# Altium PCB SPE_To_Ethernet.PcbDoc (part 3 of 3)
Units mm, origin at the board's own origin, x right, y up, seen from the top; angles counter-clockwise.
Board outline 152.4 x 101.6 mm, 4 copper layers (Top Layer, GND, Power, Bottom Layer), stack 1.526 mm thick; 154 components, 131 nets, 628 pads, 232 vias.
Unrouted connection lines stored in the file: 149.
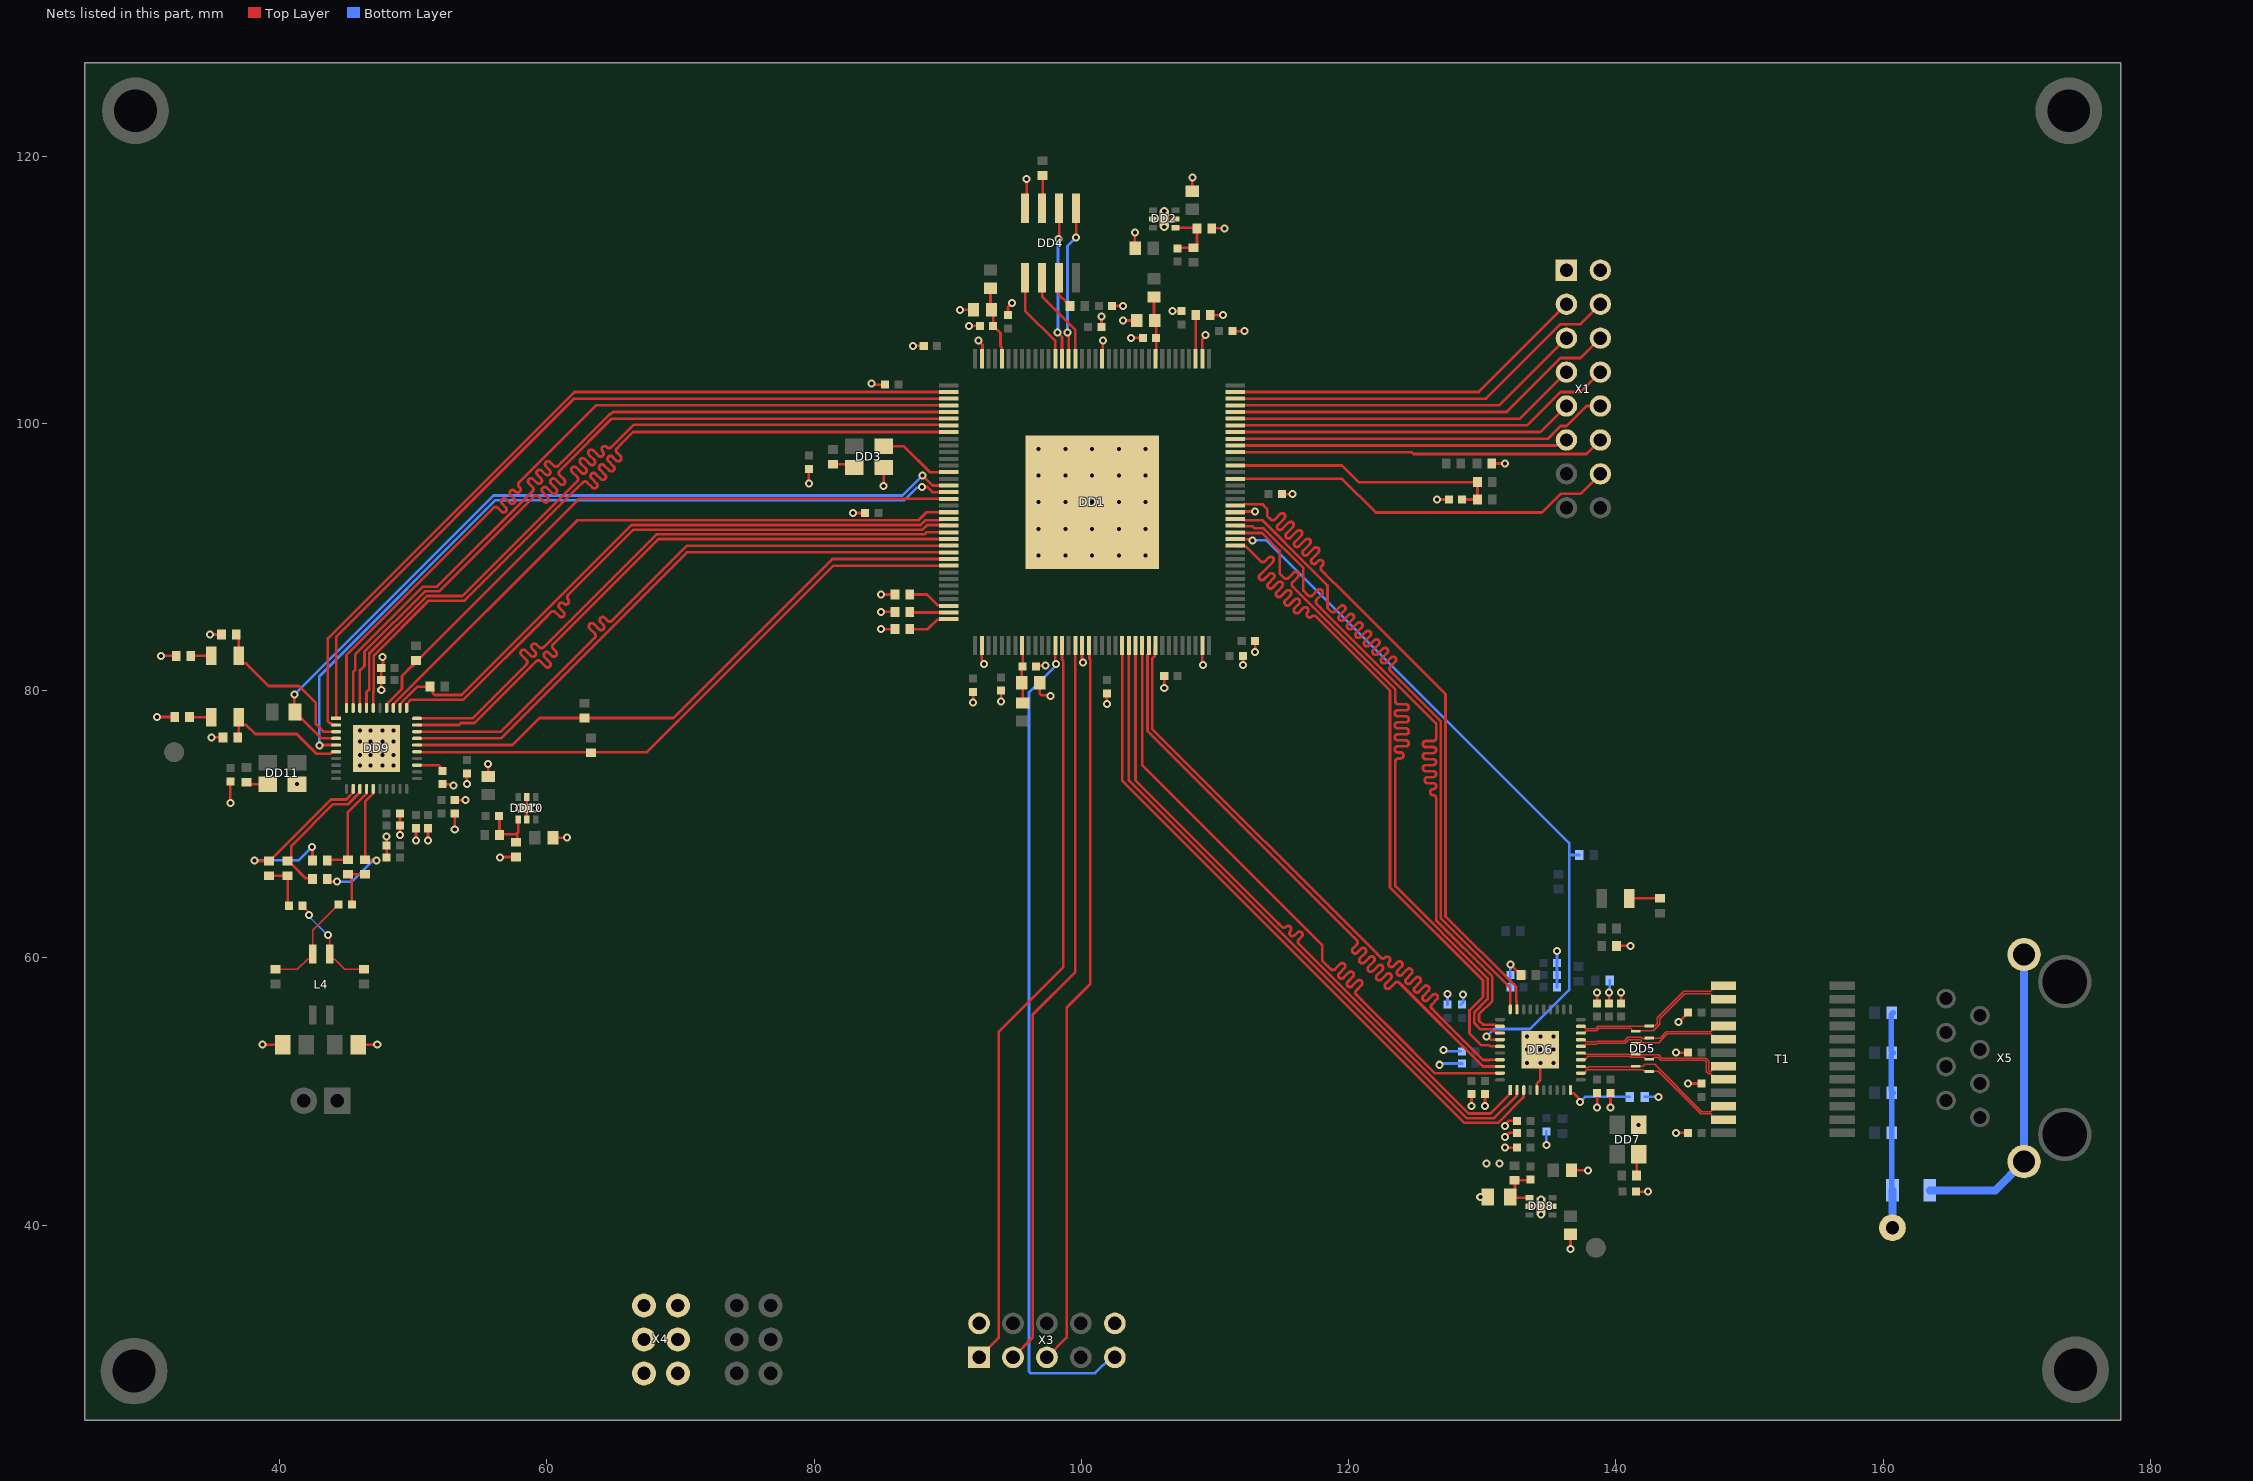
[diagram p4: the nets of this part, all layers, seen from the top]

## Via types
v1: diameter 0.6, hole 0.3, Top Layer to Bottom Layer, tented both sides, 207 vias
v2: diameter 0.7, hole 0.3, Top Layer to Bottom Layer, tented both sides, 25 vias

## Nets (pads, with @x,y where several pads share a name; then routed paths per layer and width w, separated by ;. In a path a pad name is that pad's centre, name@x,y a point inside that pad or via, vN(x,y) a via of type N, cw(c..) or ccw(c..) an arc to the next point about the centre after c; other vN are vias at no path point) (continued)
ETH_RX_CTL: DD1.48 DD6.35 | length 57.6
  Top Layer w0.2: DD1.48@111.525,90.85 111.575,90.8 112.304,90.8 112.5,90.604 112.5,90.6 113.35,89.75 113.421,89.679 ccw(c113.58,89.838) 113.739,89.679 114.009,89.949 cw(c114.168,89.79) 114.327,89.949 cw(c114.168,89.79) 114.327,89.631 113.35,88.654 ccw(c113.509,88.495) 113.35,88.336 ccw(c113.509,88.495) 113.668,88.336 114.063,88.731 cw(c114.222,88.572) 114.381,88.731 cw(c114.222,88.572) 114.381,88.412 113.986,88.018 ccw(c114.145,87.858) 113.986,87.699 ccw(c114.145,87.858) 114.305,87.699 114.693,88.088 cw(c114.853,87.929) 115.012,88.088 cw(c114.853,87.929) 115.012,87.77 114.623,87.381 ccw(c114.782,87.222) 114.623,87.063 ccw(c114.782,87.222) 114.941,87.063 115.33,87.452 cw(c115.489,87.293) 115.648,87.452 cw(c115.489,87.293) 115.648,87.134 115.259,86.745 ccw(c115.418,86.586) 115.259,86.427 ccw(c115.418,86.586) 115.577,86.427 115.966,86.815 cw(c116.125,86.656) 116.284,86.815 cw(c116.125,86.656) 116.284,86.497 115.958,86.171 ccw(c116.117,86.012) 115.958,85.853 ccw(c116.117,86.012) 116.277,85.853 116.603,86.179 cw(c116.762,86.02) 116.921,86.179 cw(c116.762,86.02) 116.921,85.861 ccw(c117.08,85.702) 116.921,85.543 ccw(c117.08,85.702) 117.239,85.543 cw(c117.398,85.384) 117.557,85.543 117.943,85.157 118.013,85.087 123.1,80 123.1,65.274 130.05,58.324 130.05,57.072 129.05,56.072 129.05,54.35 129.95,53.45 130.272,53.45 130.528,53.45 130.603,53.375 DD6.35@131.325,53.375
ETH_RXC: DD1.49 DD6.34 R14.1 | length 54.9
  Top Layer w0.2: DD1.49@111.525,91.35 111.539,91.336 112.605,91.336 112.692,91.25 v1(112.8,91.25) ; v1(130.3,54.1) 130.408,54.1 130.633,53.875 DD6.34@131.325,53.875
  Bottom Layer w0.2: v1(112.8,91.25) 113.85,91.25 136.5,68.6 136.5,67.7 ; v1(130.3,54.1) 130.875,54.675 133.575,54.675 136.5,57.6 136.5,67.7 ; R14.1@137.25,67.7 136.5,67.7
ETH_RXD_0: DD1.50 DD6.33 | length 57.6
  Top Layer w0.2: DD1.50@111.525,91.85 112.1,91.85 112.15,91.8 112.267,91.8 113.5,91.8 114.836,90.464 114.836,88.759 115.097,88.497 115.168,88.427 ccw(c115.327,88.586) 115.486,88.427 115.875,88.816 cw(c116.034,88.657) 116.194,88.816 cw(c116.034,88.657) 116.194,88.497 115.805,88.109 ccw(c115.964,87.949) 115.805,87.79 116.027,87.568 116.097,87.497 117,86.595 123.5,80.095 123.5,79.3 123.5,79.2 ccw(c123.725,79.2) 123.725,78.975 124.275,78.975 cw(c124.275,78.75) 124.5,78.75 cw(c124.275,78.75) 124.275,78.525 123.675,78.525 ccw(c123.675,78.3) 123.45,78.3 ccw(c123.675,78.3) 123.675,78.075 124.275,78.075 cw(c124.275,77.85) 124.5,77.85 cw(c124.275,77.85) 124.275,77.625 123.675,77.625 ccw(c123.675,77.4) 123.45,77.4 ccw(c123.675,77.4) 123.675,77.175 124.275,77.175 cw(c124.275,76.95) 124.5,76.95 cw(c124.275,76.95) 124.275,76.725 123.675,76.725 ccw(c123.675,76.5) 123.45,76.5 ccw(c123.675,76.5) 123.675,76.275 124.275,76.275 cw(c124.275,76.05) 124.5,76.05 cw(c124.275,76.05) 124.275,75.825 123.675,75.825 ccw(c123.675,75.6) 123.45,75.6 ccw(c123.675,75.6) 123.675,75.375 123.878,75.375 cw(c123.878,75.15) 124.103,75.15 cw(c123.878,75.15) 123.878,74.925 123.725,74.925 ccw(c123.725,74.7) 123.5,74.7 123.5,74.259 123.5,65.369 130.4,58.469 130.4,56.927 129.4,55.927 129.4,55.117 129.867,54.65 130.699,54.65 130.848,54.5 130.933,54.5 130.936,54.5 131.061,54.375 DD6.33@131.325,54.375
ETH_RXD_1: DD1.51 DD6.32 | length 56.6
  Top Layer w0.2: DD1.51@111.525,92.35 111.575,92.3 112.8,92.3 112.95,92.15 113.645,92.15 116.609,89.186 116.609,87.491 116.9,87.2 116.971,87.129 ccw(c117.13,87.288) 117.289,87.129 117.678,87.518 cw(c117.837,87.359) 117.996,87.518 cw(c117.837,87.359) 117.996,87.2 117.607,86.811 ccw(c117.766,86.652) 117.607,86.493 117.829,86.271 117.9,86.2 126.549,77.551 126.549,77 126.549,76.45 cw(c126.324,76.45) 126.324,76.225 125.774,76.225 ccw(c125.774,76) 125.549,76 ccw(c125.774,76) 125.774,75.775 126.324,75.775 cw(c126.324,75.55) 126.549,75.55 cw(c126.324,75.55) 126.324,75.325 125.774,75.325 ccw(c125.774,75.1) 125.549,75.1 ccw(c125.774,75.1) 125.774,74.875 126.324,74.875 cw(c126.324,74.65) 126.549,74.65 cw(c126.324,74.65) 126.324,74.425 125.774,74.425 ccw(c125.774,74.2) 125.549,74.2 ccw(c125.774,74.2) 125.774,73.975 126.324,73.975 cw(c126.324,73.75) 126.549,73.75 cw(c126.324,73.75) 126.324,73.525 125.913,73.525 ccw(c125.913,73.3) 125.688,73.3 ccw(c125.913,73.3) 125.913,73.075 126.324,73.075 cw(c126.324,72.85) 126.549,72.85 cw(c126.324,72.85) 126.324,72.625 ccw(c126.324,72.4) 126.099,72.4 ccw(c126.324,72.4) 126.324,72.175 cw(c126.324,71.95) 126.549,71.95 126.549,71.396 126.549,62.815 130.75,58.614 130.75,56.782 129.75,55.782 129.75,55.289 130.039,55 130.933,55 130.937,55 131.061,54.875 DD6.32@131.325,54.875
ETH_RXD_2: DD1.52 DD6.30 | length 57.6
  Top Layer w0.2: DD1.52@111.525,92.85 112.1,92.85 112.2,92.75 113.54,92.75 116.959,89.331 118.412,87.878 118.412,86.188 118.6,86 118.671,85.929 ccw(c118.83,86.088) 118.989,85.929 119.378,86.318 cw(c119.537,86.159) 119.696,86.318 cw(c119.537,86.159) 119.696,86 119.305,85.609 ccw(c119.464,85.449) 119.305,85.29 ccw(c119.464,85.449) 119.623,85.29 120.014,85.682 cw(c120.173,85.523) 120.332,85.682 cw(c120.173,85.523) 120.332,85.364 119.941,84.972 ccw(c120.1,84.813) 119.941,84.654 ccw(c120.1,84.813) 120.259,84.654 120.651,85.045 cw(c120.81,84.886) 120.969,85.045 cw(c120.81,84.886) 120.969,84.727 120.577,84.336 ccw(c120.736,84.177) 120.577,84.018 ccw(c120.736,84.177) 120.896,84.018 121.287,84.409 cw(c121.446,84.25) 121.605,84.409 cw(c121.446,84.25) 121.605,84.091 121.214,83.699 ccw(c121.373,83.54) 121.214,83.381 ccw(c121.373,83.54) 121.532,83.381 121.923,83.773 cw(c122.083,83.614) 122.242,83.773 cw(c122.083,83.614) 122.242,83.454 121.85,83.063 ccw(c122.009,82.904) 121.85,82.745 ccw(c122.009,82.904) 122.168,82.745 122.56,83.136 cw(c122.719,82.977) 122.878,83.136 cw(c122.719,82.977) 122.878,82.818 122.487,82.427 ccw(c122.646,82.267) 122.487,82.108 ccw(c122.646,82.267) 122.805,82.108 123.167,82.47 cw(c123.326,82.311) 123.485,82.47 cw(c123.326,82.311) 123.485,82.152 123.125,81.793 ccw(c123.285,81.634) 123.125,81.475 123.465,81.135 123.536,81.064 126.899,77.701 126.899,62.96 132.1,57.759 DD6.30@132.1,56.15
ETH_RXD_3: DD1.54 DD6.29 | length 58
  Top Layer w0.2: DD1.54@111.525,93.85 112.1,93.85 112.2,93.95 113.55,93.95 113.9,93.6 113.9,93.078 114.089,92.889 ; DD6.29@132.6,56.15 132.59,56.16 132.59,56.732 132.55,56.772 132.55,57.804 127.249,63.105 127.249,77.977 127.249,79.751 119.7,87.3 119.678,87.3 118.239,88.739 118.168,88.81 117.978,89 cw(c118.137,89.159) 117.978,89.318 118.046,89.386 ccw(c117.887,89.545) 118.046,89.704 ccw(c117.887,89.545) 117.728,89.704 117.563,89.54 cw(c117.404,89.699) 117.245,89.54 cw(c117.404,89.699) 117.245,89.858 117.73,90.343 ccw(c117.571,90.502) 117.73,90.662 ccw(c117.571,90.502) 117.412,90.662 116.927,90.176 cw(c116.768,90.335) 116.609,90.176 cw(c116.768,90.335) 116.609,90.494 117.094,90.98 ccw(c116.935,91.139) 117.094,91.298 ccw(c116.935,91.139) 116.776,91.298 116.291,90.813 cw(c116.131,90.972) 115.972,90.813 cw(c116.131,90.972) 115.972,91.131 116.458,91.616 ccw(c116.299,91.775) 116.458,91.934 ccw(c116.299,91.775) 116.14,91.934 115.654,91.449 cw(c115.495,91.608) 115.336,91.449 cw(c115.495,91.608) 115.336,91.767 115.821,92.252 ccw(c115.662,92.412) 115.821,92.571 ccw(c115.662,92.412) 115.503,92.571 115.018,92.085 cw(c114.859,92.244) 114.7,92.085 cw(c114.859,92.244) 114.7,92.404 115.185,92.889 ccw(c115.026,93.048) 115.185,93.207 ccw(c115.026,93.048) 114.867,93.207 114.478,92.818 cw(c114.319,92.977) 114.16,92.818 ; 114.089,92.889 114.16,92.818 ; 114.089,92.889 114.16,92.818
ETH_TX_CTL: DD1.28 DD6.37 | length 51
  Top Layer w0.2: DD1.28@105.55,83.375 105.5,83.325 105.5,82.596 105.3,82.396 105.3,77.122 122.111,60.311 122.182,60.24 122.404,60.018 ccw(c122.563,60.177) 122.722,60.018 cw(c122.881,59.859) 123.04,60.018 cw(c122.881,59.859) 123.04,59.7 123.036,59.696 ccw(c123.195,59.536) 123.036,59.377 ccw(c123.195,59.536) 123.354,59.377 123.649,59.673 cw(c123.808,59.514) 123.967,59.673 cw(c123.808,59.514) 123.967,59.355 123.672,59.059 ccw(c123.831,58.9) 123.672,58.741 ccw(c123.831,58.9) 123.99,58.741 124.384,59.135 cw(c124.543,58.975) 124.702,59.135 cw(c124.543,58.975) 124.702,58.816 124.313,58.427 ccw(c124.472,58.268) 124.313,58.109 ccw(c124.472,58.268) 124.631,58.109 125.02,58.498 cw(c125.179,58.339) 125.338,58.498 cw(c125.179,58.339) 125.338,58.18 124.949,57.791 ccw(c125.109,57.632) 124.949,57.473 ccw(c125.109,57.632) 125.268,57.473 125.657,57.862 cw(c125.816,57.703) 125.975,57.862 cw(c125.816,57.703) 125.975,57.544 125.586,57.155 ccw(c125.745,56.996) 125.586,56.836 ccw(c125.745,56.996) 125.904,56.836 126.293,57.225 cw(c126.452,57.066) 126.611,57.225 cw(c126.452,57.066) 126.611,56.907 126.222,56.518 ccw(c126.381,56.359) 126.222,56.2 126.54,55.882 126.611,55.811 126.961,55.461 130.072,52.35 130.55,52.35 130.575,52.375 DD6.37@131.325,52.375
ETH_TXC: DD1.27 DD6.38 | length 51
  Top Layer w0.2: DD1.27@105.05,83.375 105.05,82.8 104.95,82.7 104.95,82.633 104.95,76.977 120.314,61.614 120.384,61.543 120.611,61.316 cw(c120.452,61.157) 120.611,60.998 120.327,60.714 ccw(c120.486,60.555) 120.327,60.396 ccw(c120.486,60.555) 120.645,60.396 120.929,60.68 cw(c121.088,60.521) 121.247,60.68 cw(c121.088,60.521) 121.247,60.362 120.858,59.973 ccw(c121.018,59.814) 120.858,59.655 ccw(c121.018,59.814) 121.177,59.655 121.566,60.044 cw(c121.725,59.884) 121.884,60.044 cw(c121.725,59.884) 121.884,59.725 121.495,59.336 ccw(c121.654,59.177) 121.495,59.018 ccw(c121.654,59.177) 121.813,59.018 122.202,59.407 cw(c122.361,59.248) 122.52,59.407 cw(c122.361,59.248) 122.52,59.089 122.131,58.7 ccw(c122.29,58.541) 122.131,58.382 ccw(c122.29,58.541) 122.449,58.382 122.838,58.771 cw(c122.997,58.612) 123.157,58.771 cw(c122.997,58.612) 123.157,58.453 122.768,58.064 ccw(c122.927,57.905) 122.768,57.745 ccw(c122.927,57.905) 123.086,57.745 123.475,58.134 cw(c123.634,57.975) 123.793,58.134 123.864,58.064 130.052,51.875 DD6.38@131.325,51.875
ETH_TXD_0: DD1.26 DD6.39 | length 50.8
  Top Layer w0.2: DD1.26@104.55,83.375 104.55,74.45 118.021,60.979 118.021,59.796 118.359,59.459 118.429,59.388 118.66,59.157 ccw(c118.82,59.316) 118.979,59.157 119.368,59.546 cw(c119.527,59.386) 119.686,59.546 cw(c119.527,59.386) 119.686,59.227 119.297,58.838 ccw(c119.456,58.679) 119.297,58.52 ccw(c119.456,58.679) 119.615,58.52 120.004,58.909 cw(c120.163,58.75) 120.322,58.909 cw(c120.163,58.75) 120.322,58.591 119.933,58.202 ccw(c120.092,58.043) 119.933,57.884 ccw(c120.092,58.043) 120.251,57.884 120.64,58.273 cw(c120.799,58.114) 120.959,58.273 cw(c120.799,58.114) 120.959,57.955 120.57,57.566 ccw(c120.729,57.407) 120.57,57.247 120.888,56.929 120.959,56.859 121.915,55.903 123.309,54.509 126.442,51.375 DD6.39@131.325,51.375
ETH_TXD_1: DD1.25 DD6.1 | length 51
  Top Layer w0.2: DD1.25@104.05,83.375 104.05,73.272 114.661,62.661 114.732,62.59 114.999,62.323 ccw(c115.158,62.482) 115.318,62.323 cw(c115.477,62.164) 115.636,62.323 cw(c115.477,62.164) 115.636,62.005 ccw(c115.795,61.845) 115.636,61.686 ccw(c115.795,61.845) 115.954,61.686 116.168,61.901 cw(c116.327,61.742) 116.486,61.901 cw(c116.327,61.742) 116.486,61.582 116.272,61.368 ccw(c116.431,61.209) 116.272,61.05 116.59,60.732 116.661,60.661 117.011,60.311 128.972,48.35 130.6,48.35 132.075,49.825 132.075,50.075 DD6.1@132.1,50.1
ETH_TXD_2: DD1.24 DD6.2 | length 50.7
  Top Layer w0.2: DD1.24@103.55,83.375 103.55,73.277 128.827,48 130.89,48 132.59,49.7 132.59,50.09 DD6.2@132.6,50.1
ETH_TXD_3: DD1.23 DD6.3 | length 52.1
  Top Layer w0.2: DD1.23@103.05,83.375 103.05,73.282 128.682,47.65 131.171,47.65 133.09,49.57 133.09,50.09 DD6.3@133.1,50.1
Flash_CLK_2: DD1.93 DD4.6 | length 7.1
  Top Layer w0.2: DD4.6@97.065,110.9 97.065,109.489 99.55,107.004 DD1.93@99.55,104.825
Flash_CS_2: DD1.94 DD4.1 | length 11.6
  Top Layer w0.2: v1(98.964,106.812) 98.964,106.704 99.05,106.618 DD1.94@99.05,104.825 ; v1(99.6,113.9) 99.605,113.905 DD4.1@99.605,116.1
  Bottom Layer w0.2: v1(98.964,106.812) 98.964,113.264 v1(99.6,113.9)
Flash_DI_2: DD1.96 DD4.5 | length 7
  Top Layer w0.2: DD4.5@95.795,110.9 95.795,108.427 98.05,106.172 DD1.96@98.05,104.825
Flash_DO_2: DD1.95 DD4.2 | length 11.5
  Top Layer w0.2: v1(98.2,106.8) 98.55,106.45 DD1.95@98.55,104.825 ; v1(98.3,113.8) 98.335,113.835 DD4.2@98.335,116.1
  Bottom Layer w0.2: v1(98.2,106.8) 98.25,106.85 98.25,113.75 v1(98.3,113.8)
FPGA_CLK_2: DD1.122 DD3.3 | length 5.7
  Top Layer w0.2: DD3.3@85.2,98.3 86.7,98.3 88.65,96.35 DD1.122@90.075,96.35
FPGA_IO1_2: DD1.71 X1.3 | length 27.5
  Top Layer w0.2: DD1.71@111.525,102.35 129.73,102.35 X1.3@136.3,108.92
FPGA_IO2_2: DD1.70 X1.4 | length 30.2
  Top Layer w0.2: DD1.70@111.525,101.85 130.285,101.85 135.865,107.43 137.35,107.43 X1.4@138.84,108.92
FPGA_IO3_2: DD1.69 X1.5 | length 26.9
  Top Layer w0.2: DD1.69@111.525,101.35 131.27,101.35 X1.5@136.3,106.38
FPGA_IO4_2: DD1.68 X1.6 | length 29.6
  Top Layer w0.2: DD1.68@111.525,100.85 131.825,100.85 135.865,104.89 137.35,104.89 X1.6@138.84,106.38
FPGA_IO5_2: DD1.67 X1.7 | length 26.2
  Top Layer w0.2: DD1.67@111.525,100.35 132.81,100.35 X1.7@136.3,103.84
FPGA_IO6_2: DD1.66 X1.8 | length 29
  Top Layer w0.2: DD1.66@111.525,99.85 133.365,99.85 135.865,102.35 137.35,102.35 X1.8@138.84,103.84
FPGA_IO7_2: DD1.65 X1.9 | length 25.6
  Top Layer w0.2: DD1.65@111.525,99.35 134.35,99.35 X1.9@136.3,101.3
FPGA_IO8_2: DD1.64 X1.10 | length 28.3
  Top Layer w0.2: DD1.64@111.525,98.85 134.905,98.85 135.865,99.81 136.295,99.81 137.785,101.3 X1.10@138.84,101.3
FPGA_IO9_2: DD1.63 X1.11 | length 24.9
  Top Layer w0.2: DD1.63@111.525,98.35 135.511,98.35 135.921,98.76 X1.11@136.3,98.76
FPGA_IO10_2: DD1.62 X1.12 | length 27.8
  Top Layer w0.2: DD1.62@111.525,97.85 124.711,97.85 124.851,97.71 137.79,97.71 X1.12@138.84,98.76
GND: C1.1 C2.1 C4.1 C5.1 C6.1 C7.1 C8.1 C9.1 C10.1 C11.1 C12.1 C13.1 C14.1 C15.1 C16.1 C17.1 C18.1 C19.1 C20.1 C21.1 C22.1 C23.1 C24.1 C25.1 C26.1 C27.1 C29.1 C30.1 C31.1 C32.1 C33.1 C34.1 C35.1 C36.1 C37.1 C38.1 C39.1 C40.1 C41.1 C42.1 C43.1 C44.1 C45.1 C47.1 C48.1 C49.1 C50.1 C51.1 C52.1 C53.1 C54.1 C55.1 C58.1 C59.1 C60.1 C61.1 C62.1 C63.1 C64.1 C66.1 C67.1 C68.1 C69.1 C70.1 C71.1 C72.1 C73.1 C74.1 C75.1 DD1.2 DD1.17 DD1.35 DD1.53 DD1.74 DD1.89 DD1.107 DD1.145 DD2.2 DD2.5 DD2.EP DD3.2 DD4.4 DD6.5 DD6.41 DD7.2 DD8.2 DD8.5 DD8.EP DD9.41 DD10.2 DD10.5 DD10.EP DD11.2 R2.1 R6.1 R7.1 R8.1 R9.1 R11.2 R22.1 R26.1 R27.1 R28.1 R31.1 R45.1 R46.1 R47.2 R48.2 R51.1 X1.1 X1.2 X3.2 X3.10 X4.1 X4.2 X4.3 X4.4 X4.5 X4.6 | length 105
  Top Layer w0.2: v1(30.8,78.025) 31.85,78.025 R46.1@31.85,78.036 ; v1(31.1,82.6) R45.1@32.25,82.6 ; v1(34.8,84.2) R48.2@35.65,84.2 ; v1(34.9,76.5) R47.2@35.75,76.5 ; v1(36.3,71.6) C64.1@36.3,73.2 ; v1(38.7,53.5) C59.1@40.225,53.5 ; C58.1@45.875,53.5 v1(47.3,53.5) ; v1(47.6,80.058) C66.1@47.6,80.8 C67.1@47.6,81.7 47.734,81.834 47.734,82.466 v1(47.7,82.5) ; C71.1@48,67.5 C70.1@48,68.4 v1(48,69.1) ; v1(49,69.2) C68.1@49,69.9 C69.1@49,70.8 ; v1(50.2,68.8) C61.1@50.2,69.7 ; v1(51.1,68.8) C60.1@51.1,69.7 ; C75.1@52.2,73 52.792,73 52.892,72.9 v1(53,72.9) ; v1(53.1,69.6) C73.1@53.1,70.8 ; C72.1@53.1,71.8 v1(53.9,71.8) ; v1(54,73) C74.1@54,73.8 ; C63.1@55.6,73.575 v1(55.6,74.5) ; v1(56.5,67.5) 56.55,67.55 R51.1@57.7,67.55 ; DD10.2@58.5,70.35 DD10.EP@58.5,71.2 DD10.5@58.5,72.05 ; C62.1@60.45,69 v1(61.5,69) ; v1(79.6,95.5) C17.1@79.6,96.6 ; v1(82.9,93.3) C5.1@83.8,93.3 ; v1(84.3,103) 84.408,103 84.508,102.9 C6.1@85.3,102.9 ; v1(85,84.6) R9.1@86.05,84.6 ; v1(85,85.9) R8.1@86.05,85.9 ; v1(85,87.2) R7.1@86.05,87.2 ; v1(85.2,95.3) DD3.2@85.2,96.7 ; v1(87.4,105.8) C19.1@88.2,105.8 ; v1(90.9,108.5) C23.1@91.925,108.5 ; v1(91.6,107.3) C24.1@92.4,107.3 ; v1(91.9,79.1) C15.1@91.9,79.9 ; v1(92.3,106.2) 92.3,106.183 92.6,105.883 92.6,105.567 92.6,104.875 DD1.107@92.55,104.825 ; DD1.2@92.55,83.375 92.55,82.258 92.7,82.108 v1(92.7,82) ; v1(94,79.2) C11.1@94,80 ; C14.1@94.5,108.1 94.5,108.698 v1(94.8,109) v1(94.8,109) ; DD4.4@95.795,116.1 95.9,116.205 v1(95.9,118.3) v1@95.86,118.26 ; C22.1@96.6,81.8 96.673,81.873 v1(97.304,81.873) ; C21.1@96.875,80.6 96.875,79.8 97.026,79.649 97.651,79.649 v1(97.7,79.6) ; DD1.17@100.05,83.375 100.05,82.155 v1(100.105,82.1) ; C8.1@101.5,107.2 v1(101.5,108) ; DD1.89@101.55,104.825 101.6,104.875 v1(101.6,106.2) ; v1(101.9,79) C12.1@101.9,79.8 ; C20.1@102.3,108.8 v1(103.1,108.8) ; v1(103.1,107.7) C25.1@104.15,107.7 ; v1(103.7,106.4) C26.1@104.6,106.4 ; v1(104,114.3) 104,113.125 C1.1@104.025,113.1 ; DD2.5@105.35,115.3 DD2.EP@106.2,115.3 DD2.2@107.05,115.3 ; v1(106.2,80.2) C13.1@106.2,81.1 ; v1(106.8,108.4) C7.1@107.5,108.4 ; C2.1@108.3,117.375 v1(108.3,118.4) ; DD1.35@109.05,83.375 109.05,81.95 v1(109.1,81.9) ; DD1.74@109.05,104.825 109.05,106.283 109.3,106.533 v1(109.3,106.6) ; R11.2@109.65,108.1 v1(110.6,108.1) ; R2.1@109.75,114.6 v1(110.7,114.6) ; C18.1@111.3,106.9 v1(112.2,106.9) ; DD1.53@111.525,93.35 111.575,93.4 112.267,93.4 v1(113,93.4) ; v1(112.1,81.9) C16.1@112.1,82.6 ; v1(113,82.9) C10.1@113,83.7 ; C9.1@115,94.7 v1(115.8,94.7) ; v1(126.6,94.3) C4.1@127.5,94.3 ; v1(129.2,48.9) C55.1@129.2,49.8 ; v1(129.85,42.1) R31.1@130.7,42.1 ; v1(130.2,48.9) C54.1@130.2,49.8 ; R6.1@130.7,97 v1(131.7,97) ; v1(131.7,45.8) C49.1@132.6,45.8 ; v1(131.7,46.6) 131.702,46.6 132.002,46.9 C48.1@132.6,46.9 ; v1(131.7,47.4) 131.777,47.477 131.777,47.594 131.983,47.8 C47.1@132.6,47.8 ; v1(132.1,59.5) 132.625,58.975 132.675,58.975 132.9,58.75 R28.1@132.9,58.7 ; DD8.2@133.55,41.4 DD8.EP@134.4,41.4 DD8.5@135.25,41.4 ; DD6.5@134.1,50.1 134.1,50.364 134.076,50.388 134.076,50.576 134.35,50.85 v1(134.35,52.125) ; v1(136.6,38.2) C45.1@136.6,39.325 ; C44.1@136.675,44.1 v1(137.9,44.1) ; v1(138.6,48.8) C40.1@138.6,49.9 ; C37.1@138.6,56.6 v1(138.6,57.4) ; C38.1@139.5,56.6 v1(139.5,57.4) ; v1(139.6,48.8) C41.1@139.6,49.9 ; R27.1@140.05,60.9 v1(141.1,60.9) ; C39.1@140.4,56.6 v1(140.4,57.4) ; C33.1@141.5,42.5 v1(142.4,42.5) ; v1(144.5,46.9) C29.1@145.4,46.9 ; v1(144.5,52.9) C31.1@145.4,52.9 ; v1(144.7,55.2) 145.2,55.7 C32.1@145.4,55.9 ; v1(145.4,50.6) C30.1@146.4,50.6
  Bottom Layer w0.2: v1(126.8,52) 126.908,52 127.008,52.1 C53.1@128.5,52.1 ; v1(127.1,53.1) 127.208,53.1 127.308,53 C52.1@128.4,53 ; C43.1@127.4,56.5 v1(127.4,57.3) ; C42.1@128.4,56.5 128.566,56.666 v1(128.566,57.266) ; C51.1@132.1,57.8 C50.1@132.1,58.7 v1(132.1,59.5) ; v1(134.8,46) C27.1@134.8,47 ; C34.1@135.6,57.8 v1(135.6,60.5) ; v1(139.5,57.4) 139.55,57.45 R26.1@139.55,58.3 ; R22.1@142.15,49.6 v1(143.2,49.6)
  other v1: 134.4,40.8 134.4,41.9 130.3,44.6 131.3,44.6 141.7,47.5 133.35,52.125 135.35,52.125 133.35,53.125 134.35,53.125 135.35,53.125 133.35,54.125 134.35,54.125 135.35,54.125 57.9,71.2 59.1,71.2 41.3,73 46,74.4 46.8,74.4 47.7,74.4 48.5,74.4 46,75.2 46.8,75.2 47.7,75.2 48.5,75.2 46,76.2 46.8,76.2 47.7,76.2 48.5,76.2 46,77 46.8,77 47.7,77 48.5,77 106.2,114.7 106.2,115.9
  other v2: 96.8,90.1 98.8,90.1 100.8,90.1 102.8,90.1 104.8,90.1 96.8,92.1 98.8,92.1 100.8,92.1 102.8,92.1 104.8,92.1 96.8,94.1 98.8,94.1 100.8,94.1 102.8,94.1 104.8,94.1 96.8,96.1 98.8,96.1 100.8,96.1 102.8,96.1 104.8,96.1 96.8,98.1 98.8,98.1 100.8,98.1 102.8,98.1 104.8,98.1
JTAG_TCK_2: DD1.14 X3.1 | length 55.9
  Top Layer w0.2: X3.1@92.34,30.1 93.817,31.577 93.817,54.501 98.65,59.333 98.65,82.228 98.55,82.328 DD1.14@98.55,83.375
JTAG_TDI_2: DD1.16 X3.3 | length 55.2
  Top Layer w0.2: X3.3@94.88,30.1 96.357,31.577 96.357,55.76 99.55,58.953 DD1.16@99.55,83.375
JTAG_TDO_2: DD1.18 X3.5 | length 54.7
  Top Layer w0.2: X3.5@97.42,30.1 98.897,31.577 98.897,56.266 100.655,58.024 100.655,82.328 100.6,82.383 100.6,83.325 DD1.18@100.55,83.375
JTAG_TMS_2: DD1.13 X3.9 | length 62.2
  Top Layer w0.2: DD1.13@98.05,83.375 98.05,82.05 v1(98.1,82)
  Bottom Layer w0.2: v1(98.1,82) 98.1,81.892 96.077,79.869 96.077,29.04 96.194,28.923 101.023,28.923 102.2,30.1 X3.9@102.5,30.1
LED_0_4: DD9.3 LED2.2 R48.1 | length 12.4
  Top Layer w0.2: R48.1@36.75,84.2 36.925,84.025 LED2.2@36.925,82.6 36.925,82.338 37.225,82.038 37.487,82.038 39.175,80.35 41.428,80.35 42.7,79.078 42.7,77.5 43.275,76.925 DD9.3@44.225,76.925
LED_1_4: DD9.6 LED3.2 R47.1 | length 10.2
  Top Layer w0.2: R47.1@36.625,76.725 R47.1@36.85,76.5 36.925,76.575 LED3.2@36.925,77.738 ; LED3.2@36.925,78 LED3.2@36.925,77.738 ; DD9.6@44.225,75.425 43.961,75.425 43.811,75.275 42.749,75.275 41.275,76.748 38.177,76.748 37.487,77.438 37.225,77.438 LED3.2@36.925,77.738
MDI_0_3_N: DD5.9 DD6.13 T1.22 | length 12.5
  Top Layer w0.1: DD6.13@137.375,51.875 137.666,51.875 137.751,51.789 137.91,51.789 137.987,51.866 141.491,51.866 DD5.9@141.5,51.875 ; DD5.9@141.5,51.9 142.041,51.9 142.169,52.028 142.892,52.028 146.437,48.483 147.111,48.483 147.17,48.542 147.17,48.63 147.44,48.9 T1.22@148.06,48.9
MDI_0_3_P: DD5.1 DD6.12 T1.23 | length 12.5
  Top Layer w0.1: DD6.12@137.375,51.375 137.625,51.375 137.873,51.623 141.999,51.623 142.08,51.542 142.458,51.542 DD5.1@142.5,51.5 ; DD5.1@142.5,51.442 142.5,51.517 143.168,51.517 146.369,48.317 147.111,48.317 147.17,48.258 147.17,48.17 147.44,47.9 T1.23@148.06,47.9
MDI_1_3_N: DD5.8 DD6.15 T1.19 | length 11.9
  Top Layer w0.1: DD6.15@137.375,52.875 137.666,52.875 137.741,52.8 DD5.8@141.5,52.8 141.55,52.75 141.9,52.75 141.915,52.736 143.203,52.736 143.438,52.5 146.714,52.5 146.946,52.268 146.946,51.542 147.005,51.483 147.117,51.483 147.176,51.542 147.176,51.63 147.446,51.9 T1.19@148.06,51.9
MDI_1_3_P: DD5.2 DD6.14 T1.20 | length 12.5
  Top Layer w0.1: DD6.14@137.375,52.375 137.666,52.375 137.925,52.634 141.075,52.634 141.139,52.569 142.141,52.569 142.2,52.511 DD5.2@142.2,52.45 ; DD5.2@142.5,52.45 142.8,52.45 142.8,52.511 142.859,52.569 143.134,52.569 143.37,52.334 146.645,52.334 146.78,52.199 146.78,51.473 146.936,51.317 147.117,51.317 147.176,51.258 147.176,51.17 147.446,50.9 T1.20@148.06,50.9 ; DD5.2@142.2,52.45 DD5.2@142.25,52.4 ; DD5.2@142.2,52.45 DD5.2@142.25,52.4 ; DD5.2@142.25,52.4 DD5.2@142.5,52.4 DD5.2@142.25,52.4
MDI_2_3_N: DD5.4 DD6.17 T1.16 | length 11.4
  Top Layer w0.1: DD6.17@137.375,53.875 137.592,53.875 137.759,53.708 138.488,53.708 138.551,53.771 140.632,53.771 140.904,54.043 141.895,54.043 142.003,53.936 142.085,53.936 142.1,53.95 142.45,53.95 DD5.4@142.5,54 143.304,54 143.787,54.483 147.117,54.483 147.176,54.542 147.176,54.63 147.446,54.9 T1.16@148.06,54.9
MDI_2_3_P: DD5.7 DD6.16 T1.17 | length 12
  Top Layer w0.1: DD6.16@137.375,53.375 137.592,53.375 137.759,53.542 138.557,53.542 138.62,53.604 140.701,53.604 140.973,53.877 141.827,53.877 141.885,53.818 141.885,53.735 DD5.7@141.8,53.65 ; DD5.7@141.5,53.6 141.75,53.6 DD5.7@141.8,53.65 ; T1.17@148.06,53.9 147.446,53.9 147.176,54.17 147.176,54.258 147.117,54.317 143.855,54.317 143.195,53.657 141.859,53.657 141.852,53.65 DD5.7@141.8,53.65
MDI_3_3_N: DD5.5 DD6.19 T1.13 | length 12.4
  Top Layer w0.1: DD6.19@137.375,54.875 137.592,54.875 137.759,54.708 138.488,54.708 138.66,54.88 142.48,54.88 142.507,54.907 142.926,54.907 143.1,55.082 143.1,55.5 145.083,57.483 147.117,57.483 147.176,57.542 147.176,57.63 147.446,57.9 T1.13@148.06,57.9
MDI_3_3_P: DD5.6 DD6.18 T1.14 | length 12.6
  Top Layer w0.1: DD6.18@137.375,54.375 137.634,54.375 137.801,54.542 138.557,54.542 138.729,54.714 141.141,54.714 141.2,54.655 141.2,54.55 141.25,54.5 141.75,54.5 141.8,54.55 141.852,54.55 141.859,54.557 142.81,54.557 143.266,55.013 143.266,55.431 145.152,57.317 147.117,57.317 147.176,57.258 147.176,57.17 147.446,56.9 T1.14@148.06,56.9
NetC3_2: C3.2 DD2.1 R1.2 R2.2 | length 4.1
  Top Layer w0.2: DD2.1@107.05,114.65 R2.2@108.4,114.65 ; C3.2@107.2,113.1 107.25,113.15 108.425,113.15 108.65,113.375 R2.2@108.65,114.6
NetC4_2: C4.2 DD1.60 R3.1 R5.2 | length 21.1
  Top Layer w0.2: DD1.60@111.525,96.85 119.505,96.85 120.755,95.6 R3.1@129.65,95.6 R5.2@129.65,94.3 C4.2@128.5,94.3
NetC28_2: C28.2 R17.1 R19.1 R21.1 R25.1 X6.1 | length 16.4
  Bottom Layer w0.2: C28.2@160.65,42.65 C28.2@160.7,42.6
  Bottom Layer w0.4: C28.2@160.65,42.65 R17.1@160.65,46.9 160.65,49.8 160.75,49.9 160.6,50.05 160.6,52.75 160.75,52.9 160.6,53.05 160.6,55.75 R25.1@160.75,55.9
  Bottom Layer w0.6: X6.1@160.7,39.8 C28.2@160.7,42.6
NetC46_2: C46.2 DD8.1 R30.2 R31.2 | length 4.3
  Top Layer w0.2: R31.2@131.8,42.1 R31.2@132.45,42.1 ; DD8.1@133.55,42.05 132.5,42.05 R31.2@132.45,42.1 ; C46.2@133.6,43.4 133.55,43.35 R30.2@132.4,43.35 132.45,43.3 R31.2@132.45,42.1
NetC56_1: C56.1 R32.2 R35.2 | length 3.7
  Top Layer w0.2: R32.2@39.2,66.15 R35.2@40.6,66.15 40.6,64 C56.1@40.7,63.9
NetC56_2: C56.2 L4.1 R34.2 | length 7.3
  Top Layer w0.117: C56.2@41.7,63.9 42.108,63.492 ; v1(43.6,61.7) 43.6,61.569 43.735,61.434 L4.1@43.735,60.284 43.735,60.119 43.957,59.897 44.121,59.897 44.869,59.15 R34.2@46.3,59.15
  Bottom Layer w0.117: v1(42.2,63.2) 42.2,63.1 v1(43.6,61.7)
NetC57_1: C57.1 R37.2 R40.2 | length 3.7
  Top Layer w0.2: R37.2@45.1,66.25 R37.2@45.15,66.25 ; C57.1@45.4,64 45.4,65.908 45.375,65.933 45.375,66.025 R37.2@45.15,66.25 ; R40.2@46.4,66.25 R37.2@45.15,66.25
NetC57_2: C57.2 L4.2 R39.2 | length 7.8
  Top Layer w0.1: R39.2@39.7,59.15 41.331,59.15 42.094,59.912 42.235,59.912 42.465,60.142 L4.2@42.465,60.284 42.465,62.065 C57.2@44.4,64
NetC65_2: C65.2 DD10.1 R49.2 R51.2 | length 4.6
  Top Layer w0.2: C65.2@56.45,70.65 C65.2@56.4,70.6 56.45,70.55 R49.2@56.45,69.2 56.5,69.25 57.7,69.25 57.775,69.325 ; R51.2@57.7,68.65 57.775,68.725 57.775,69.325 ; DD10.1@57.85,70.35 57.85,69.4 57.775,69.325
NetC75_2: C75.2 DD9.23 | length 2.2
  Top Layer w0.2: DD9.23@50.275,74.425 51.875,74.425 C75.2@52.3,74
NetDD1_75: DD1.75 R11.1 | length 3.3
  Top Layer w0.2: DD1.75@108.55,104.825 R11.1@108.55,108.1
NetDD1_142: DD1.142 R7.2 | length 3.3
  Top Layer w0.2: R7.2@87.15,87.2 88.432,87.2 89.232,86.4 90.025,86.4 DD1.142@90.075,86.35
NetDD1_143: DD1.143 R8.2 | length 2.9
  Top Layer w0.2: R8.2@87.15,85.9 87.2,85.85 DD1.143@90.075,85.85
NetDD1_144: DD1.144 R9.2 | length 3.2
  Top Layer w0.2: R9.2@87.15,84.6 88.5,84.6 89.213,85.313 90.038,85.313 DD1.144@90.075,85.35
NetDD3_1: DD3.1 R10.2 | length 1.8
  Top Layer w0.2: R10.2@81.4,96.95 82.75,96.95 DD3.1@83,96.7 ; DD3.1@82.95,96.95 DD3.1@83,97
NetDD4_3: DD4.3 R12.2 | length 2.5
  Top Layer w0.2: DD4.3@97.065,116.1 97.1,116.135 R12.2@97.1,118.55 R12.2@97.13,118.52
NetDD4_7: DD4.7 R13.1 | length 2.5
  Top Layer w0.2: DD4.7@98.335,110.9 98.335,109.615 98.875,109.075 98.925,109.075 99.15,108.85 R13.1@99.15,108.8
NetDD6_10: DD6.10 R22.2 | length 5.2
  Top Layer w0.2: DD6.10@136.6,50.1 136.6,49.898 136.623,49.874 136.825,49.874 137.223,49.476 137.223,49.277 v1(137.3,49.2)
  Bottom Layer w0.2: v1(137.3,49.2) 137.7,49.6 R22.2@141.05,49.6
NetDD7_1: DD7.1 R29.2 | length 1.7
  Top Layer w0.2: R29.2@141.55,43.7 141.55,45.15 DD7.1@141.7,45.3
NetDD11_1: DD11.1 R50.2 | length 1.7
  Top Layer w0.2: R50.2@37.5,73.15 37.65,73 DD11.1@39.1,73
NetLED1_2: LED1.2 R20.1 | length 2.3
  Top Layer w0.2: LED1.2@141,64.45 R20.1@143.3,64.45
NetLED2_1: LED2.1 R45.2 | length 1.5
  Top Layer w0.2: R45.2@33.35,82.6 LED2.1@34.875,82.6
NetLED3_1: LED3.1 R46.2 | length 1.7
  Top Layer w0.2: R46.2@33.25,78.025 33.275,78 LED3.1@34.875,78 LED3.1@34.825,78.05
PE: C28.1 X5.11 X5.12 | length 23.4
  Bottom Layer w0.6: C28.1@163.5,42.6 168.395,42.6 X5.12@170.55,44.755 X5.11@170.55,60.245
PWM_Output_2: DD1.58 X1.14 | length 29.6
  Top Layer w0.2: DD1.58@111.525,95.85 119.515,95.85 122.04,93.325 134.46,93.325 135.865,94.73 137.35,94.73 X1.14@138.84,96.22
RX_4_N: DD9.13 R35.1 R38.1 | length 10.7
  Top Layer w0.2: R38.1@42.45,65.9 42.392,65.958 41.942,65.958 40.917,66.983 R35.1@40.65,67.25 ; DD9.13@46,72.65 46,72.386 45.875,72.261 45.875,72.258 45.875,72.245 45.13,71.5 43.995,71.5 40.875,68.38 40.875,67.475 R35.1@40.65,67.25 ; R35.1@40.65,67.25 R35.1@40.6,67.25 R35.1@40.65,67.25
RX_4_P: DD9.14 R33.1 R37.1 | length 7.5
  Top Layer w0.2: R33.1@43.55,67.3 43.6,67.35 R37.1@45.1,67.35 45.1,70.9 46.49,72.29 46.49,72.64 DD9.14@46.5,72.65
SPE_CTL: DD1.115 DD9.37 | length 60
  Top Layer w0.2: DD9.37@46.5,78.7 46.5,79.9 46.7,80.1 46.7,82.773 51.01,87.083 53.683,87.083 62.2,95.6 62.271,95.671 ccw(c62.112,95.83) 62.271,95.989 61.882,96.378 cw(c62.041,96.537) 61.882,96.696 cw(c62.041,96.537) 62.2,96.696 62.589,96.307 ccw(c62.748,96.466) 62.907,96.307 ccw(c62.748,96.466) 62.907,96.625 62.518,97.014 cw(c62.677,97.173) 62.518,97.332 cw(c62.677,97.173) 62.836,97.332 63.225,96.944 ccw(c63.384,97.103) 63.544,96.944 ccw(c63.384,97.103) 63.544,97.262 63.155,97.651 cw(c63.314,97.81) 63.155,97.969 cw(c63.314,97.81) 63.473,97.969 63.862,97.58 ccw(c64.021,97.739) 64.18,97.58 ccw(c64.021,97.739) 64.18,97.898 64.163,97.915 cw(c64.322,98.074) 64.163,98.233 cw(c64.322,98.074) 64.482,98.233 64.498,98.216 ccw(c64.657,98.375) 64.816,98.216 65.108,98.508 66.5,99.9 89.45,99.9 89.5,99.85 DD1.115@90.075,99.85
SPE_I\N\T\: DD1.136 DD9.25 R42.2 | length 45.6
  Top Layer w0.2: DD9.25@50.275,75.425 50.539,75.425 50.564,75.4 61.25,75.4 63.3,75.4 67.5,75.4 81.45,89.35 DD1.136@90.075,89.35
SPE_LINK_ST: DD1.124 DD9.4 R43.1 | length 61.4
  Top Layer w0.2: v1(41.1,79.7) 41.1,78.45 R43.1@41.15,78.4 41.15,78.25 41.525,77.875 41.675,77.875 43.125,76.425 DD9.4@44.225,76.425 ; v1(88.1,96.1) 88.85,95.35 DD1.124@90.075,95.35
  Bottom Layer w0.2: v1(41.1,79.7) 56,94.6 86.6,94.6 v1(88.1,96.1)
SPE_MDC: DD1.134 DD9.27 | length 45.6
  Top Layer w0.2: DD9.27@50.275,76.425 56.547,76.425 70.472,90.35 DD1.134@90.075,90.35
SPE_MDIO: DD1.135 DD9.26 R44.2 | length 45.6
  Top Layer w0.2: DD9.26@50.275,75.925 57.42,75.925 59.445,77.95 69.462,77.95 81.362,89.85 DD1.135@90.075,89.85
SPE_R\E\S\E\T\: DD1.125 DD9.5 | length 59.6
  Top Layer w0.2: v1(42.97,75.897) 42.997,75.925 DD9.5@44.225,75.925 ; v1(88.061,95.239) 88.466,95.239 88.855,94.85 DD1.125@90.075,94.85
  Bottom Layer w0.2: v1(42.97,75.897) 42.97,81.075 56.145,94.25 86.745,94.25 87.673,95.178 88,95.178 v1(88.061,95.239)
SPE_RX_CTL: DD1.128 DD9.33 | length 47.8
  Top Layer w0.2: DD9.33@48.5,78.7 48.5,78.964 48.625,79.089 48.625,79.105 62.27,92.75 87.823,92.75 88.423,93.35 DD1.128@90.075,93.35
SPE_RX_ER: DD1.126 DD9.34 R41.1 | length 49.3
  Top Layer w0.2: DD9.34@48,78.7 48,78.964 48.125,79.089 48.125,79.11 49.15,80.135 49.15,81.1 49.875,81.825 49.925,81.825 50.15,82.05 50.15,82.1 50.15,82.15 50.375,82.375 50.425,82.375 62.4,94.35 DD1.126@90.075,94.35
SPE_RXC: DD1.129 DD9.32 R36.1 | length 47.8
  Top Layer w0.2: DD9.32@49,78.7 49,78.964 49.125,79.089 49.125,79.105 50.32,80.3 R36.1@51.25,80.3 51.466,80.084 51.466,79.792 51.584,79.675 53.603,79.675 66.328,92.4 87.968,92.4 88.318,92.75 89.4,92.75 89.45,92.8 90.025,92.8 DD1.129@90.075,92.85
SPE_RXD_0: DD1.130 DD9.31 | length 48.3
  Top Layer w0.2: DD9.31@49.5,78.7 49.5,78.964 49.525,78.989 49.525,79.01 49.84,79.325 53.748,79.325 59.911,85.489 60.3,85.878 cw(c60.459,85.718) 60.619,85.878 60.926,85.57 ccw(c61.085,85.729) 61.244,85.57 ccw(c61.085,85.729) 61.244,85.888 60.937,86.196 cw(c61.096,86.355) 60.937,86.514 cw(c61.096,86.355) 61.255,86.514 ccw(c61.414,86.673) 61.573,86.514 ccw(c61.414,86.673) 61.573,86.832 cw(c61.732,86.991) 61.573,87.15 61.961,87.539 66.473,92.05 88.113,92.05 88.463,92.4 90.025,92.4 DD1.130@90.075,92.35
SPE_RXD_1: DD1.131 DD9.30 | length 48.3
  Top Layer w0.2: DD9.30@50.275,77.925 54.43,77.925 58.403,81.897 58.473,81.968 ccw(c58.314,82.127) 58.473,82.286 58.084,82.675 cw(c58.243,82.834) 58.084,82.994 cw(c58.243,82.834) 58.403,82.994 58.791,82.605 ccw(c58.951,82.764) 59.11,82.605 ccw(c58.951,82.764) 59.11,82.923 58.898,83.134 cw(c59.057,83.293) 58.898,83.452 cw(c59.057,83.293) 59.217,83.452 59.428,83.241 ccw(c59.587,83.4) 59.746,83.241 60.253,83.747 68.205,91.7 68.5,91.7 88.258,91.7 88.408,91.85 DD1.131@90.075,91.85
SPE_RXD_2: DD1.132 DD9.29 | length 48.3
  Top Layer w0.2: DD9.29@50.275,77.425 53.425,77.425 53.575,77.575 54.575,77.575 58.8,81.8 59.189,82.189 cw(c59.348,82.03) 59.507,82.189 59.896,81.8 ccw(c60.055,81.959) 60.214,81.8 ccw(c60.055,81.959) 60.214,82.118 59.825,82.507 cw(c59.984,82.666) 59.825,82.825 cw(c59.984,82.666) 60.144,82.825 60.355,82.614 ccw(c60.514,82.773) 60.673,82.614 ccw(c60.514,82.773) 60.673,82.932 60.462,83.144 cw(c60.621,83.303) 60.462,83.462 61.6,84.6 68.35,91.35 DD1.132@90.075,91.35
SPE_RXD_3: DD1.133 DD9.28 | length 48.3
  Top Layer w0.2: DD9.28@50.275,76.925 56.552,76.925 63.515,83.888 63.585,83.958 ccw(c63.426,84.117) 63.585,84.276 63.196,84.665 cw(c63.356,84.824) 63.196,84.984 cw(c63.356,84.824) 63.515,84.984 63.904,84.595 ccw(c64.063,84.754) 64.222,84.595 ccw(c64.063,84.754) 64.222,84.913 64.011,85.124 cw(c64.17,85.283) 64.011,85.442 cw(c64.17,85.283) 64.329,85.442 64.54,85.231 ccw(c64.699,85.39) 64.858,85.231 65.214,85.586 70.477,90.85 DD1.133@90.075,90.85
SPE_TX_ER: DD1.116 DD9.36 | length 60
  Top Layer w0.2: DD9.36@47,78.7 47,79.9 47.05,79.95 47.05,82.628 51.155,86.733 53.833,86.733 62.3,95.2 62.689,95.589 cw(c62.848,95.43) 63.007,95.589 63.396,95.2 ccw(c63.555,95.359) 63.714,95.2 ccw(c63.555,95.359) 63.714,95.518 63.323,95.91 cw(c63.482,96.069) 63.323,96.228 cw(c63.482,96.069) 63.641,96.228 64.032,95.836 ccw(c64.192,95.995) 64.351,95.836 ccw(c64.192,95.995) 64.351,96.155 63.959,96.546 cw(c64.118,96.705) 63.959,96.864 cw(c64.118,96.705) 64.277,96.864 64.669,96.473 ccw(c64.828,96.632) 64.987,96.473 ccw(c64.828,96.632) 64.987,96.791 64.596,97.182 cw(c64.755,97.342) 64.596,97.501 cw(c64.755,97.342) 64.914,97.501 65.182,97.232 ccw(c65.341,97.391) 65.5,97.232 ccw(c65.341,97.391) 65.5,97.55 65.234,97.816 cw(c65.394,97.975) 65.234,98.134 65.517,98.417 66.45,99.35 DD1.116@90.075,99.35
SPE_TXC: DD1.114 DD9.38 | length 60
  Top Layer w0.2: DD9.38@46,78.7 46,81.5 46.35,81.85 46.35,82.918 50.865,87.433 51.933,87.433 58.65,94.15 59.039,94.539 cw(c59.198,94.38) 59.357,94.539 59.746,94.15 ccw(c59.905,94.309) 60.064,94.15 ccw(c59.905,94.309) 60.064,94.468 59.675,94.857 cw(c59.834,95.016) 59.675,95.175 cw(c59.834,95.016) 59.994,95.175 60.382,94.786 ccw(c60.542,94.945) 60.701,94.786 ccw(c60.542,94.945) 60.701,95.105 60.312,95.494 cw(c60.471,95.653) 60.312,95.812 cw(c60.471,95.653) 60.63,95.812 60.976,95.466 ccw(c61.135,95.625) 61.294,95.466 ccw(c61.135,95.625) 61.294,95.784 60.948,96.13 cw(c61.107,96.289) 60.948,96.448 61.3,96.8 64.85,100.35 DD1.114@90.075,100.35
SPE_TXD_0: DD1.113 DD9.39 | length 59.9
  Top Layer w0.2: DD9.39@45.5,78.7 45.5,81.4 45.65,81.55 45.65,82.713 50.72,87.783 51.788,87.783 58.853,94.847 58.923,94.918 ccw(c58.764,95.077) 58.923,95.236 58.65,95.51 cw(c58.809,95.669) 58.65,95.828 cw(c58.809,95.669) 58.968,95.828 59.241,95.555 ccw(c59.401,95.714) 59.56,95.555 ccw(c59.401,95.714) 59.56,95.873 59.286,96.146 cw(c59.445,96.305) 59.286,96.464 cw(c59.446,96.305) 59.605,96.464 59.878,96.191 ccw(c60.037,96.35) 60.196,96.191 ccw(c60.037,96.35) 60.196,96.509 59.923,96.782 cw(c60.082,96.942) 59.923,97.101 cw(c60.082,96.942) 60.241,97.101 60.514,96.827 ccw(c60.673,96.986) 60.832,96.827 61.087,97.082 64.705,100.7 64.8,100.7 64.95,100.85 DD1.113@90.075,100.85
SPE_TXD_1: DD1.112 DD9.40 | length 60
  Top Layer w0.2: DD9.40@45,78.7 45,82.673 55.614,93.286 56.003,93.675 cw(c56.162,93.516) 56.321,93.675 56.594,93.402 ccw(c56.753,93.561) 56.912,93.402 ccw(c56.753,93.561) 56.912,93.72 56.639,93.994 cw(c56.798,94.153) 56.639,94.312 cw(c56.798,94.153) 56.957,94.312 57.23,94.038 ccw(c57.389,94.198) 57.549,94.038 ccw(c57.389,94.198) 57.549,94.357 57.275,94.63 cw(c57.434,94.789) 57.275,94.948 cw(c57.434,94.789) 57.594,94.948 57.649,94.892 ccw(c57.808,95.051) 57.967,94.892 ccw(c57.808,95.051) 57.967,95.211 57.912,95.266 cw(c58.071,95.425) 57.912,95.584 58.243,95.916 63.677,101.35 DD1.112@90.075,101.35
SPE_TXD_2: DD1.111 DD9.1 | length 59.3
  Top Layer w0.2: DD9.1@44.225,77.925 44.225,84.03 62.045,101.85 DD1.111@90.075,101.85
SPE_TXD_3: DD1.110 DD9.2 | length 61.1
  Top Layer w0.2: DD9.2@44.225,77.425 43.961,77.425 43.836,77.55 43.746,77.55 43.6,77.696 43.6,83.9 62.05,102.35 DD1.110@90.075,102.35
TX_4_N: DD9.12 R32.1 R33.2 | length 15.6
  Top Layer w0.117: v1(42.4,68.3) v1@42.45,68.25
  Top Layer w0.2: v1(38.1,67.3) 38.15,67.25 R32.1@39.2,67.25 39.25,67.25 43.85,71.85 44.98,71.85 45.49,72.36 45.49,72.64 DD9.12@45.5,72.65 ; R33.2@42.45,67.3 v1@42.45,68.25
  Bottom Layer w0.2: v1(38.1,67.3) 41.4,67.3 v1(42.4,68.3)
TX_4_P: DD9.15 R38.2 R40.1 | length 10.8
  Top Layer w0.2: R38.2@43.55,65.9 43.75,65.7 v1(44.3,65.7) ; DD9.15@47,72.65 46.99,72.64 46.99,72.29 46.4,71.7 R40.1@46.4,67.35 v1@47.25,67.35
  Bottom Layer w0.2: v1(44.3,65.7) 45.4,65.7 46.923,67.223 47.173,67.223 v1(47.25,67.3)
VCCPLLL0_2: C21.2 C22.2 DD1.8 L1.2 | length 4.4
  Top Layer w0.2: DD1.8@95.55,83.375 95.6,83.325 C22.2@95.6,81.8 95.525,81.725 C21.2@95.525,80.6 95.6,80.525 L1.2@95.6,79.075
VCCPLLR0_2: C23.2 C24.2 DD1.104 L2.2 | length 5.7
  Top Layer w0.2: L2.2@93.2,110.125 93.2,108.575 C23.2@93.275,108.5 93.4,108.375 C24.2@93.4,107.3 93.95,106.75 93.95,105.796 94.036,105.71 94.036,104.839 DD1.104@94.05,104.825
VCCPLLR1_2: C25.2 C26.2 DD1.81 L3.2 | length 4.7
  Top Layer w0.2: L3.2@105.437,109.463 105.437,107.762 C25.2@105.5,107.7 105.6,107.6 C26.2@105.6,106.4 105.6,104.875 DD1.81@105.55,104.825
pads on no net: DD1.3 DD1.4 DD1.6 DD1.7 DD1.9 DD1.10 DD1.11 DD1.12 DD1.15 DD1.20 DD1.21 DD1.22 DD1.30 DD1.32 DD1.33 DD1.34 DD1.42 DD1.43 DD1.44 DD1.45 DD1.46 DD1.47 DD1.56 DD1.57 DD1.72 DD1.76 DD1.78 DD1.79 DD1.80 DD1.82 DD1.83 DD1.84 DD1.85 DD1.86 DD1.87 DD1.88 DD1.90 DD1.92 DD1.97 DD1.98 DD1.99 DD1.100 DD1.101 DD1.102 DD1.105 DD1.106 DD1.117 DD1.118 DD1.119 DD1.120 DD1.121 DD1.123 DD1.137 DD1.138 DD1.139 DD1.140 DD1.141 DD5.3 DD6.8 DD9.9 DD9.10 DD9.11 DD9.18 DD9.21 X3.4 X3.7 X3.8 X5.9 X5.10

## Polygon pours and split planes (outlines as drawn)
GND on GND (split plane): 177.29,25.91 25.91,25.91 25.91,126.49 177.29,126.49
+3V3 on Power (split plane): 177.29,25.91 25.91,25.91 25.91,126.49 177.29,126.49